# Altium PCB go_sign.PcbDoc (part 3 of 3)
Units mm, origin at the board's own origin, x right, y up, seen from the top; angles counter-clockwise.
Board outline 188.34 x 188.34 mm, 2 copper layers (Top Layer, Bottom Layer); 124 components, 124 nets, 557 pads, 137 vias.
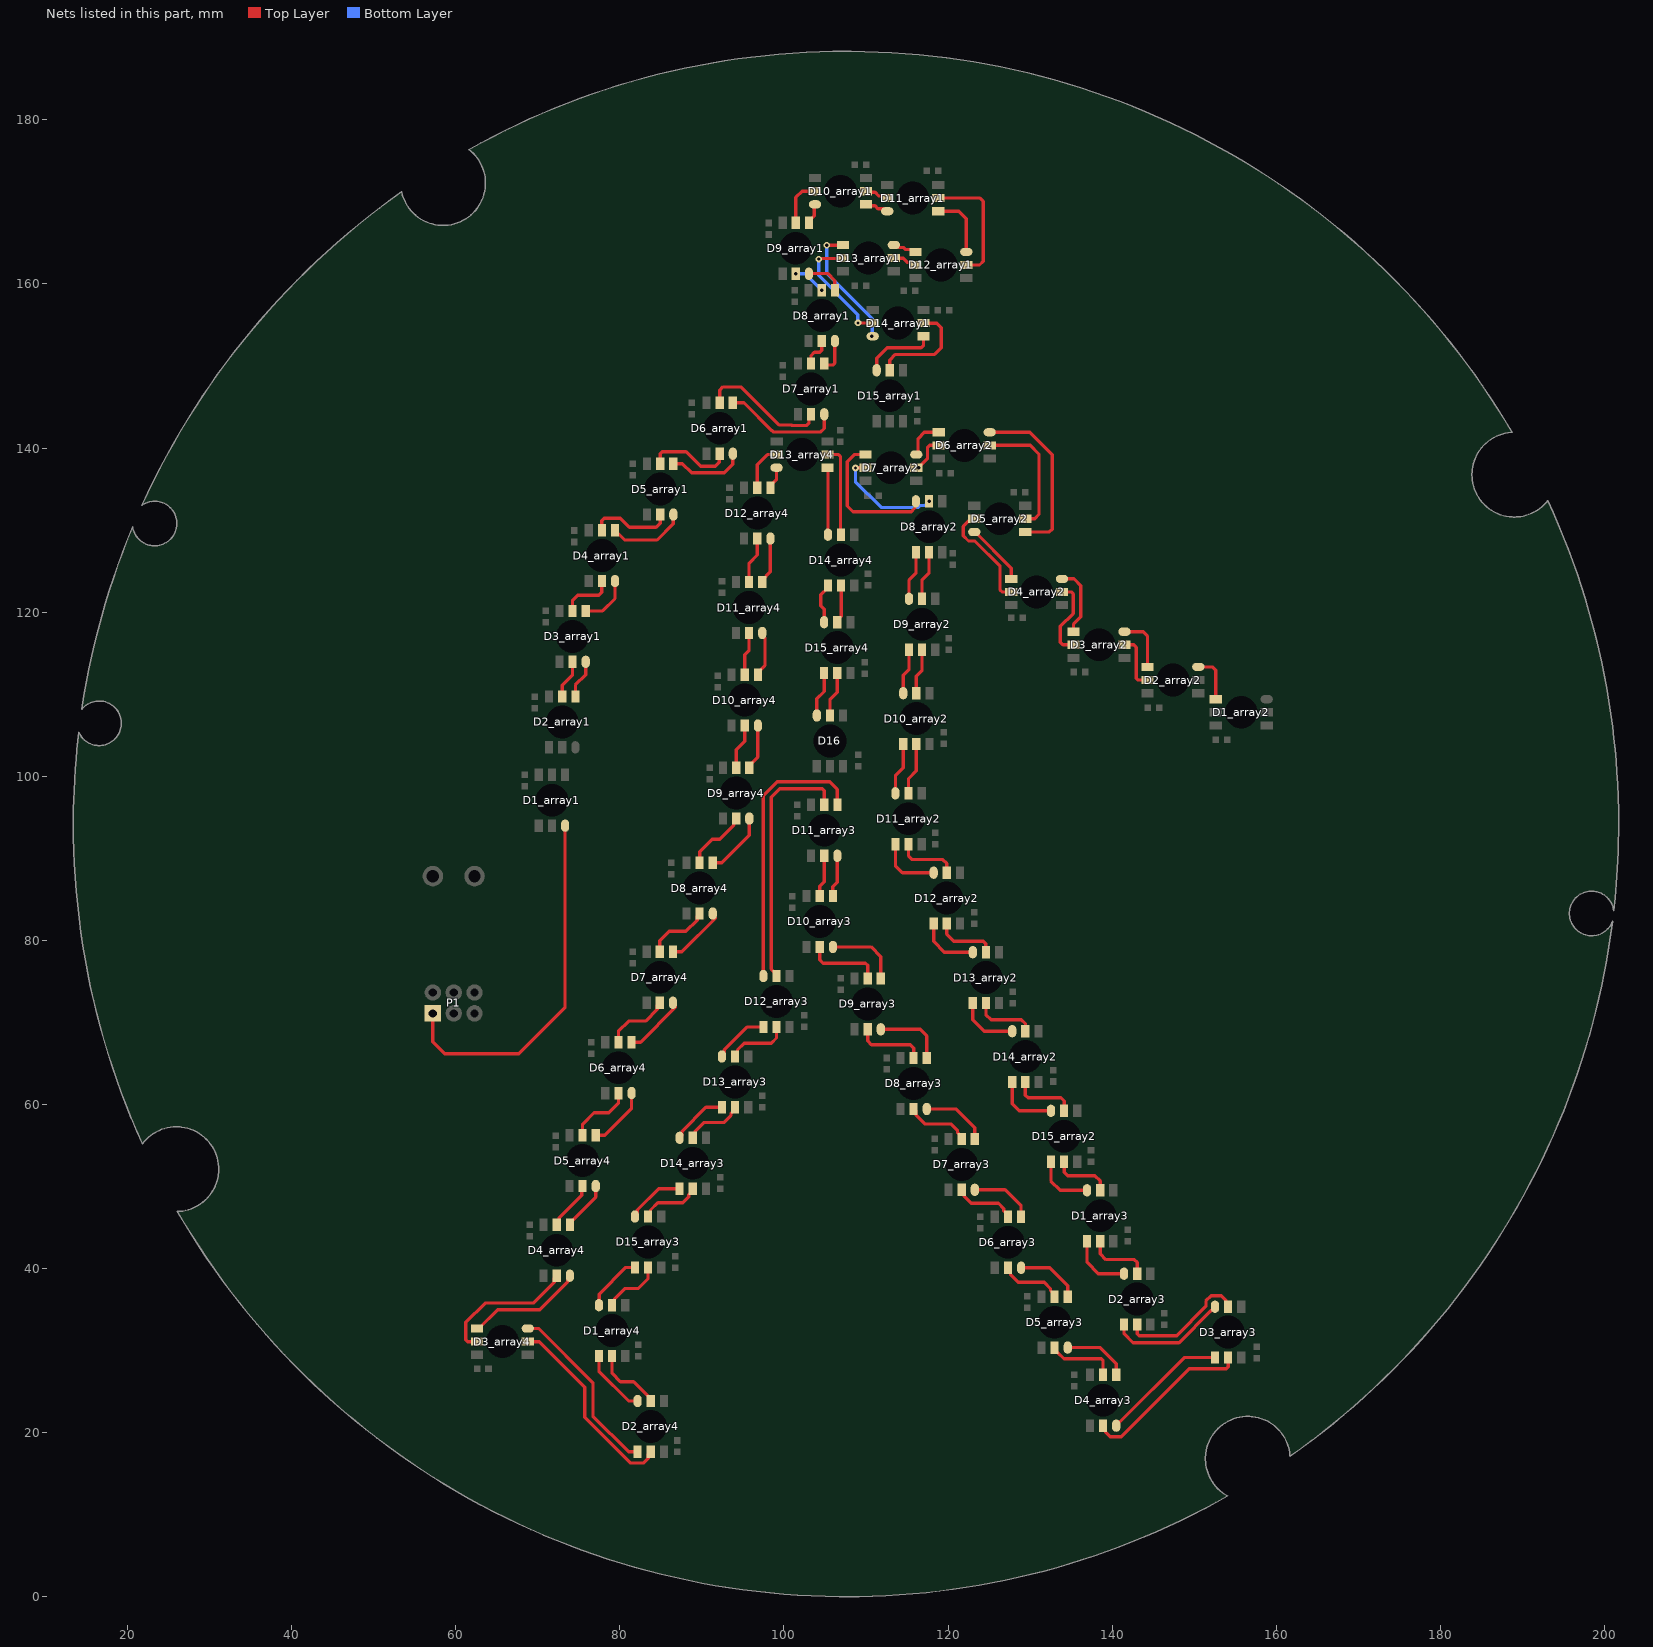
[diagram p2: the nets of this part, all layers, seen from the top]

## Via types
v1: diameter 0.8, hole 0.4, Top Layer to Bottom Layer, 137 vias

## Nets (pads, with @x,y where several pads share a name; then routed paths per layer and width w, separated by ;. In a path a pad name is that pad's centre, name@x,y a point inside that pad or via, vN(x,y) a via of type N, cw(c..) or ccw(c..) an arc to the next point about the centre after c; other vN are vias at no path point) (continued)
NetD1_array2_6: D1_array2.6 D2_array2.1 | length 5.8
  Top Layer w0.4: D2_array2.1@150.509,113.322 152.222,113.322 152.64,112.904 D1_array2.6@152.64,109.385
NetD1_array3_1: D1_array3.1 D15_array2.6 | length 7.2
  Top Layer w0.4: D15_array2.6@132.55,53.021 132.55,50.66 133.679,49.531 D1_array3.1@136.944,49.531
NetD1_array3_2: D1_array3.2 D15_array2.5 | length 7.3
  Top Layer w0.4: D15_array2.5@134.15,53.021 134.15,51.727 134.569,51.308 137.909,51.308 138.544,50.673 D1_array3.2@138.544,49.531
NetD1_array3_5: D1_array3.5 D2_array3.2 | length 7.9
  Top Layer w0.4: D1_array3.5@138.544,43.331 138.544,41.783 139.243,41.084 142.71,41.084 143.053,40.742 D2_array3.2@143.053,39.371
NetD1_array3_6: D1_array3.6 D2_array3.1 | length 7.7
  Top Layer w0.4: D1_array3.6@136.944,43.331 136.944,40.741 138.315,39.371 D2_array3.1@141.453,39.371
NetD1_array4_1: D1_array4.1 D15_array3.6 | length 7.1
  Top Layer w0.4: D1_array4.1@77.458,35.536 77.494,35.572 77.494,36.886 80.739,40.131 D15_array3.6@81.839,40.131
NetD1_array4_2: D1_array4.2 D15_array3.5 | length 7.4
  Top Layer w0.4: D1_array4.2@79.057,35.536 79.358,35.836 79.358,36.334 80.581,37.558 82.216,37.558 83.439,38.781 D15_array3.5@83.439,40.131
NetD1_array4_5: D1_array4.5 D2_array4.2 | length 8.4
  Top Layer w0.4: D1_array4.5@79.057,29.336 79.057,27.216 80.08,26.194 81.677,26.194 83.769,24.102 D2_array4.2@83.769,23.852
NetD1_array4_6: D1_array4.6 D2_array4.1 | length 8.1
  Top Layer w0.4: D1_array4.6@77.458,29.336 77.457,27.464 81.069,23.852 D2_array4.1@82.169,23.852
NetD2_array1_5: D2_array1.5 D3_array1.2 | length 4.7
  Top Layer w0.4: D2_array1.5@72.987,109.716 72.987,111.087 74.244,112.344 D3_array1.2@74.244,113.943
NetD2_array1_6: D2_array1.6 D3_array1.1 | length 4.7
  Top Layer w0.4: D2_array1.6@74.587,109.716 74.587,111.125 75.844,112.382 D3_array1.1@75.844,113.943
NetD2_array2_5: D2_array2.5 D3_array2.2 | length 6.8
  Top Layer w0.4: D3_array2.2@141.505,116.014 142.641,116.014 142.959,115.696 142.959,111.956 143.193,111.722 D2_array2.5@144.309,111.722
NetD2_array2_6: D2_array2.6 D3_array2.1 | length 6.8
  Top Layer w0.4: D3_array2.1@141.505,117.614 143.79,117.614 144.309,117.095 D2_array2.6@144.309,113.322
NetD2_array3_5: D2_array3.5 D3_array3.2 | length 15.6
  Top Layer w0.4: D2_array3.5@143.053,33.171 143.053,32.056 143.287,31.821 147.884,31.821 151.44,35.377 151.44,36.051 152.084,36.695 153.288,36.695 153.84,36.144 153.84,35.645 D3_array3.2@154.14,35.345
NetD2_array3_6: D2_array3.6 D3_array3.1 | length 14.5
  Top Layer w0.4: D2_array3.6@141.453,33.171 141.453,32.056 142.546,30.963 148.157,30.963 152.037,34.842 152.125,34.842 152.54,35.258 D3_array3.1@152.54,35.345
NetD2_array4_5: D2_array4.5 D3_array4.2 | length 24.1
  Top Layer w0.4: D3_array4.2@68.784,31.09 70.185,31.09 75.736,25.538 75.736,21.853 81.288,16.302 82.918,16.302 83.469,16.853 83.469,17.352 D2_array4.5@83.769,17.652
NetD2_array4_6: D2_array4.6 D3_array4.1 | length 22
  Top Layer w0.4: D3_array4.1@68.784,32.69 70.134,32.69 76.727,26.097 76.727,21.994 81.069,17.652 D2_array4.6@82.169,17.652
NetD3_array1_5: D3_array1.5 D4_array1.2 | length 6.6
  Top Layer w0.4: D3_array1.5@74.244,120.143 74.244,121.437 74.854,122.047 77.445,122.047 77.813,122.415 D4_array1.2@77.813,123.786
NetD3_array1_6: D3_array1.6 D4_array1.1 | length 6.3
  Top Layer w0.4: D3_array1.6@75.844,120.143 77.903,120.143 79.413,121.653 D4_array1.1@79.413,123.786
NetD3_array2_5: D3_array2.5 D4_array2.2 | length 9.7
  Top Layer w0.4: D4_array2.2@133.897,122.453 135.013,122.453 135.247,122.219 135.247,119.827 133.693,118.272 133.693,116.332 134.01,116.014 D3_array2.5@135.305,116.014
NetD3_array2_6: D3_array2.6 D4_array2.1 | length 8.6
  Top Layer w0.4: D4_array2.1@133.897,124.053 135.357,124.053 136.182,123.228 136.182,119.431 135.305,118.553 D3_array2.6@135.305,117.614
NetD3_array3_5: D3_array3.5 D4_array3.2 | length 20.7
  Top Layer w0.4: D4_array3.2@138.9,20.852 139.2,20.552 139.2,20.054 139.751,19.502 141.105,19.502 149.398,27.795 153.906,27.795 154.14,28.03 D3_array3.5@154.14,29.145
NetD3_array3_6: D3_array3.6 D4_array3.1 | length 15.5
  Top Layer w0.4: D4_array3.1@140.5,20.852 140.5,20.94 140.915,21.355 141.003,21.355 148.793,29.145 D3_array3.6@152.54,29.145
NetD3_array4_5: D3_array4.5 D4_array4.2 | length 17.3
  Top Layer w0.4: D3_array4.5@62.584,31.09 61.469,31.09 61.234,31.324 61.234,33.438 63.58,35.784 69.468,35.784 72.014,38.329 72.014,38.827 D4_array4.2@72.314,39.128
NetD3_array4_6: D3_array4.6 D4_array4.1 | length 14.3
  Top Layer w0.4: D3_array4.6@62.584,32.69 62.834,32.69 65.128,34.984 70.268,34.984 73.614,38.329 73.614,38.827 D4_array4.1@73.914,39.128
NetD4_array1_5: D4_array1.5 D5_array1.2 | length 10.1
  Top Layer w0.4: D4_array1.5@77.813,129.986 77.813,131.153 78.092,131.432 80.065,131.432 81.17,130.327 84.417,130.327 84.925,130.835 D5_array1.2@84.925,131.888
NetD4_array1_6: D4_array1.6 D5_array1.1 | length 9.5
  Top Layer w0.4: D4_array1.6@79.413,129.986 80.608,128.791 84.544,128.791 86.525,130.772 D5_array1.1@86.525,131.888
NetD4_array2_5: D4_array2.5 D5_array2.2 | length 13.2
  Top Layer w0.4: D5_array2.2@123.202,131.369 122.901,131.069 122.48,131.069 121.852,130.44 121.852,129.313 122.496,128.669 123.258,128.669 126.347,125.579 126.347,122.688 126.582,122.453 D4_array2.5@127.697,122.453
NetD4_array2_6: D4_array2.6 D5_array2.1 | length 7.5
  Top Layer w0.4: D5_array2.1@123.289,129.769 127.697,125.361 D4_array2.6@127.697,124.053
NetD4_array3_5: D4_array3.5 D5_array3.2 | length 8.4
  Top Layer w0.4: D5_array3.2@132.99,30.36 132.99,30.11 133.29,29.81 133.335,29.81 134.135,29.01 138.666,29.01 138.9,28.776 D4_array3.5@138.9,27.052
NetD4_array3_6: D4_array3.6 D5_array3.1 | length 8.1
  Top Layer w0.4: D5_array3.1@134.59,30.36 138.542,30.36 140.5,28.402 D4_array3.6@140.5,27.052
NetD4_array4_5: D4_array4.5 D5_array4.2 | length 6
  Top Layer w0.4: D4_array4.5@72.314,45.327 72.614,45.628 72.614,46.198 75.35,48.934 75.35,49.936 D5_array4.2@75.463,50.05
NetD4_array4_6: D4_array4.6 D5_array4.1 | length 6
  Top Layer w0.4: D4_array4.6@73.914,45.327 73.914,45.577 74.214,45.878 74.237,45.878 77.063,48.704 D5_array4.1@77.063,50.05
NetD5_array1_5: D5_array1.5 D6_array1.2 | length 10.5
  Top Layer w0.4: D5_array1.5@84.925,138.088 84.925,139.294 85.166,139.535 88.075,139.535 89.84,137.769 91.643,137.769 92.126,138.252 92.126,139.254 D6_array1.2@92.177,139.305
NetD5_array1_6: D5_array1.6 D6_array1.1 | length 9.5
  Top Layer w0.4: D5_array1.6@86.525,138.088 87.631,138.088 88.75,136.969 92.748,136.969 93.777,137.998 D6_array1.1@93.777,139.305 ; D6_array1.1@93.777,139.509 D6_array1.1@93.777,139.532
NetD5_array2_5: D5_array2.5 D6_array2.2 | length 15.7
  Top Layer w0.4: D6_array2.2@125.071,140.322 130.023,140.322 131.089,139.255 131.089,131.902 130.556,131.369 D5_array2.5@129.401,131.369
NetD5_array2_6: D5_array2.6 D6_array2.1 | length 21.3
  Top Layer w0.4: D6_array2.1@125.071,141.922 129.947,141.922 132.69,139.179 132.69,130.099 132.36,129.769 D5_array2.6@129.401,129.769
NetD5_array3_5: D5_array3.5 D6_array3.2 | length 7.7
  Top Layer w0.4: D6_array3.2@127.305,40.093 127.605,39.793 127.605,39.294 128.573,38.326 131.723,38.326 132.49,37.559 132.49,37.31 132.99,36.81 D5_array3.5@132.99,36.56
NetD5_array3_6: D5_array3.6 D6_array3.1 | length 7.9
  Top Layer w0.4: D6_array3.1@128.905,40.093 132.408,40.093 134.59,37.91 D5_array3.6@134.59,36.56
NetD5_array4_5: D5_array4.5 D6_array4.2 | length 8
  Top Layer w0.4: D5_array4.5@75.463,56.249 75.463,57.599 76.853,58.989 78.674,58.989 79.832,60.147 D6_array4.2@79.832,61.378
NetD5_array4_6: D5_array4.6 D6_array4.1 | length 7.6
  Top Layer w0.4: D5_array4.6@77.063,56.249 78.163,56.249 81.432,59.518 D6_array4.1@81.432,61.378
NetD6_array1_5: D6_array1.5 D7_array1.2 | length 15.6
  Top Layer w0.4: D6_array1.5@92.177,145.505 92.177,147.053 92.57,147.447 94.762,147.447 99.391,142.817 100.904,142.817 100.966,142.756 102.774,142.756 103.07,143.052 103.07,143.684 D7_array1.2@103.302,143.915
NetD6_array1_6: D6_array1.6 D7_array1.1 | length 14.3
  Top Layer w0.4: D6_array1.6@93.777,145.505 95.136,145.505 98.536,142.105 98.565,142.105 98.714,141.956 104.478,141.956 104.902,142.379 D7_array1.1@104.902,143.915
NetD6_array2_5: D6_array2.5 D7_array2.2 | length 4.5
  Top Layer w0.4: D7_array2.2@116.346,137.605 v1(116.421,137.605) 116.421,137.633 117.513,138.725 117.513,140.088 117.747,140.322 D6_array2.5@118.871,140.322
NetD6_array2_6: D6_array2.6 D7_array2.1 | length 4.8
  Top Layer w0.4: D7_array2.1@116.346,139.204 116.346,141.149 117.119,141.922 D6_array2.6@118.871,141.922
NetD6_array3_5: D6_array3.5 D7_array3.2 | length 7.6
  Top Layer w0.4: D7_array3.2@121.666,49.592 121.966,49.292 121.966,48.794 122.817,47.943 126.154,47.943 126.805,47.291 126.805,47.043 127.305,46.543 D6_array3.5@127.305,46.293
NetD6_array3_6: D6_array3.6 D7_array3.1 | length 7.8
  Top Layer w0.4: D7_array3.1@123.266,49.592 126.955,49.592 128.905,47.643 D6_array3.6@128.905,46.293
NetD6_array4_5: D6_array4.5 D7_array4.2 | length 8.1
  Top Layer w0.4: D6_array4.5@79.832,67.578 79.832,68.928 81.063,70.159 83.143,70.159 84.574,71.59 84.574,72.089 D7_array4.2@84.874,72.389
NetD6_array4_6: D6_array4.6 D7_array4.1 | length 7.8
  Top Layer w0.4: D6_array4.6@81.432,67.578 82.532,67.578 86.784,71.829 86.474,72.139 D7_array4.1@86.474,72.389
NetD7_array1_5: D7_array1.5 D8_array1.2 | length 3.8
  Top Layer w0.4: D7_array1.5@103.302,150.115 103.302,151.27 103.716,151.684 104.376,151.684 104.61,151.918 D8_array1.2@104.61,153.034
NetD7_array1_6: D7_array1.6 D8_array1.1 | length 4.1
  Top Layer w0.4: D7_array1.6@104.902,150.115 105.976,150.115 106.21,150.35 D8_array1.1@106.21,153.034
NetD7_array2_5: D7_array2.5 D8_array2.2 | length 13.8
  Top Layer w0.4: v1(108.721,137.566) 108.74,137.585 110.127,137.585 D7_array2.5@110.146,137.605 ; D8_array2.2@117.691,133.504 v1(117.716,133.502) v1(117.716,133.502)
  Bottom Layer w0.4: v1(108.721,137.566) 108.721,135.881 111.849,132.753 116.363,132.753 116.614,133.004 117.217,133.004 v1(117.716,133.502)
NetD7_array2_6: D7_array2.6 D8_array2.1 | length 17.8
  Top Layer w0.4: D7_array2.6@110.146,139.204 108.585,139.204 107.721,138.341 107.721,132.931 108.42,132.232 115.506,132.232 115.976,132.702 115.976,133.389 D8_array2.1@116.091,133.504
NetD7_array3_5: D7_array3.5 D8_array3.2 | length 8
  Top Layer w0.4: D8_array3.2@115.807,59.451 116.107,59.151 116.107,58.653 117.138,57.622 120.335,57.622 121.166,56.791 121.166,56.542 121.666,56.042 D7_array3.5@121.666,55.792
NetD7_array3_6: D7_array3.6 D8_array3.1 | length 8.2
  Top Layer w0.4: D8_array3.1@117.407,59.451 120.957,59.451 123.266,57.142 D7_array3.6@123.266,55.792
NetD7_array4_5: D7_array4.5 D8_array4.2 | length 7.9
  Top Layer w0.4: D7_array4.5@84.874,78.589 84.874,79.939 86.035,81.1 88.064,81.1 89.425,82.461 89.425,82.96 D8_array4.2@89.725,83.26
NetD7_array4_6: D7_array4.6 D8_array4.1 | length 7.6
  Top Layer w0.4: D7_array4.6@86.474,78.589 87.574,78.589 91.66,82.675 91.325,83.01 D8_array4.1@91.325,83.26
NetD8_array1_5: D8_array1.5 D9_array1.2 | length 4
  Bottom Layer w0.4: v1(101.448,161.238) 102.606,161.238 v1(104.61,159.234)
NetD8_array1_6: D8_array1.6 D9_array1.1 | length 4.7
  Top Layer w0.4: D9_array1.1@103.048,161.238 103.088,161.279 105.324,161.279 106.21,160.393 D8_array1.6@106.21,159.234
NetD8_array2_5: D8_array2.5 D9_array2.2 | length 6
  Top Layer w0.4: D9_array2.2@116.84,121.616 116.84,123.952 117.691,124.803 D8_array2.5@117.691,127.304
NetD8_array2_6: D8_array2.6 D9_array2.1 | length 6
  Top Layer w0.4: D9_array2.1@115.24,121.616 115.24,123.863 116.091,124.714 D8_array2.6@116.091,127.304
NetD8_array3_5: D8_array3.5 D9_array3.2 | length 8.6
  Top Layer w0.4: D9_array3.2@110.211,69.15 110.211,67.742 110.668,67.285 115.392,67.285 115.807,66.869 D8_array3.5@115.807,65.651
NetD8_array3_6: D8_array3.6 D9_array3.1 | length 8.6
  Top Layer w0.4: D9_array3.1@111.811,69.15 116.6,69.15 117.407,68.343 D8_array3.6@117.407,65.651
NetD8_array4_5: D8_array4.5 D9_array4.2 | length 7.8
  Top Layer w0.4: D8_array4.5@89.725,89.46 89.725,90.81 91.242,92.327 92.166,92.327 93.883,94.044 93.883,94.542 D9_array4.2@94.183,94.842
NetD8_array4_6: D8_array4.6 D9_array4.1 | length 7.9
  Top Layer w0.4: D8_array4.6@91.325,89.46 92.425,89.46 95.783,92.818 D9_array4.1@95.783,94.842
NetD9_array1_5: D9_array1.5 D10_array1.2 | length 5.8
  Top Layer w0.4: D9_array1.5@101.448,167.438 101.448,170.536 102.21,171.298 D10_array1.2@103.796,171.298
NetD9_array1_6: D9_array1.6 D10_array1.1 | length 2.6
  Top Layer w0.4: D9_array1.6@103.048,167.438 103.048,167.688 103.683,168.323 103.683,169.585 D10_array1.1@103.796,169.698
NetD9_array2_5: D9_array2.5 D10_array2.2 | length 5.6
  Top Layer w0.4: D10_array2.2@116.141,110.123 116.141,112.204 116.84,112.903 D9_array2.5@116.84,115.416
NetD9_array2_6: D9_array2.6 D10_array2.1 | length 5.6
  Top Layer w0.4: D10_array2.1@114.542,110.123 114.542,112.294 115.24,112.992 D9_array2.6@115.24,115.416
NetD9_array3_5: D9_array3.5 D10_array3.2 | length 9.3
  Top Layer w0.4: D10_array3.2@104.369,79.196 104.369,77.61 104.762,77.216 109.944,77.216 110.211,76.949 D9_array3.5@110.211,75.35
NetD9_array3_6: D9_array3.6 D10_array3.1 | length 9.2
  Top Layer w0.4: D10_array3.1@105.969,79.446 D10_array3.1@105.969,79.196 110.618,79.196 111.811,78.004 D9_array3.6@111.811,75.35
NetD9_array4_5: D9_array4.5 D10_array4.2 | length 5.6
  Top Layer w0.4: D9_array4.5@94.183,101.042 94.183,103.236 95.225,104.277 D10_array4.2@95.225,106.171
NetD9_array4_6: D9_array4.6 D10_array4.1 | length 5.6
  Top Layer w0.4: D9_array4.6@95.783,101.042 95.783,101.292 96.825,102.334 D10_array4.1@96.825,106.171
NetD10_array1_5: D10_array1.5 D11_array1.2 | length 2.9
  Top Layer w0.4: D10_array1.5@109.996,171.298 110.135,171.159 111.112,171.159 111.555,170.716 112.341,170.716 D11_array1.2@112.597,170.459
NetD10_array1_6: D10_array1.6 D11_array1.1 | length 2.9
  Top Layer w0.4: D10_array1.6@109.996,169.698 110.182,169.511 111.108,169.511 111.46,169.159 112.297,169.159 D11_array1.1@112.597,168.859
NetD10_array2_5: D10_array2.5 D11_array2.2 | length 6.4
  Top Layer w0.4: D11_array2.2@115.189,97.918 115.189,99.72 116.141,100.673 D10_array2.5@116.141,103.923
NetD10_array2_6: D10_array2.6 D11_array2.1 | length 6.4
  Top Layer w0.4: D11_array2.1@113.589,97.918 113.589,100.076 114.542,101.029 D10_array2.6@114.542,103.923
NetD10_array3_5: D10_array3.5 D11_array3.2 | length 5.1
  Top Layer w0.4: D10_array3.5@104.369,85.396 104.369,86.601 104.915,87.147 D11_array3.2@104.915,90.309
NetD10_array3_6: D10_array3.6 D11_array3.1 | length 5.1
  Top Layer w0.4: D10_array3.6@105.969,85.396 105.969,86.525 106.515,87.071 D11_array3.1@106.515,90.309
NetD10_array4_5: D10_array4.5 D11_array4.2 | length 5.3
  Top Layer w0.4: D10_array4.5@95.225,112.371 95.225,114.799 95.758,115.333 D11_array4.2@95.758,117.461
NetD10_array4_6: D10_array4.6 D11_array4.1 | length 5.6
  Top Layer w0.4: D10_array4.6@96.825,112.371 96.825,112.621 97.69,113.486 97.69,116.879 97.358,117.211 D11_array4.1@97.358,117.461
NetD11_array1_5: D11_array1.5 D12_array1.2 | length 15.2
  Top Layer w0.4: D11_array1.5@118.797,170.459 123.901,170.459 124.308,170.053 124.308,162.776 123.838,162.306 D12_array1.2@122.237,162.306
NetD11_array1_6: D11_array1.6 D12_array1.1 | length 7.9
  Top Layer w0.4: D11_array1.6@118.797,168.859 121.31,168.859 122.237,167.932 D12_array1.1@122.237,163.906
NetD11_array2_5: D11_array2.5 D12_array2.2 | length 7.6
  Top Layer w0.4: D11_array2.5@115.189,91.718 115.189,90.272 115.621,89.84 119.38,89.84 119.85,89.37 D12_array2.2@119.85,88.241
NetD11_array2_6: D11_array2.6 D12_array2.1 | length 7.6
  Top Layer w0.4: D11_array2.6@113.589,91.718 113.589,89.103 114.451,88.241 D12_array2.1@118.25,88.241
NetD11_array3_5: D11_array3.5 D12_array3.2 | length 30.8
  Top Layer w0.4: D12_array3.2@99.098,75.642 99.098,75.892 98.798,76.192 98.754,76.192 98.45,76.496 98.45,97.433 99.48,98.463 104.68,98.463 104.915,98.229 D11_array3.5@104.915,96.508
NetD11_array3_6: D11_array3.6 D12_array3.1 | length 33.9
  Top Layer w0.4: D12_array3.1@97.474,75.666 97.498,75.69 97.498,97.612 99.2,99.314 105.588,99.314 106.515,98.387 D11_array3.6@106.515,96.508
NetD11_array4_5: D11_array4.5 D12_array4.2 | length 5.7
  Top Layer w0.4: D11_array4.5@95.758,123.661 95.758,125.969 96.749,126.96 D12_array4.2@96.749,128.967
NetD11_array4_6: D11_array4.6 D12_array4.1 | length 5.7
  Top Layer w0.4: D11_array4.6@97.358,123.661 97.358,123.911 98.349,124.902 D12_array4.1@98.349,128.967
NetD12_array1_5: D12_array1.5 D13_array1.2 | length 3
  Top Layer w0.4: D13_array1.2@113.399,163.144 114.554,163.144 115.092,162.606 115.738,162.606 D12_array1.5@116.038,162.306
NetD12_array1_6: D12_array1.6 D13_array1.1 | length 3
  Top Layer w0.4: D13_array1.1@113.399,164.744 113.7,164.444 114.562,164.444 114.8,164.206 115.738,164.206 D12_array1.6@116.038,163.906
NetD12_array2_5: D12_array2.5 D13_array2.2 | length 7.6
  Top Layer w0.4: D12_array2.5@119.85,82.041 119.85,80.759 120.709,79.901 124.303,79.901 124.612,79.591 124.612,78.563 D13_array2.2@124.625,78.551
NetD12_array2_6: D12_array2.6 D13_array2.1 | length 7.5
  Top Layer w0.4: D12_array2.6@118.25,82.041 118.25,79.857 119.557,78.551 D13_array2.1@123.025,78.551
NetD12_array3_5: D12_array3.5 D13_array3.2 | length 7.6
  Top Layer w0.4: D13_array3.2@94.043,65.838 94.344,66.138 94.344,66.637 95.171,67.464 98.47,67.464 99.098,68.092 D12_array3.5@99.098,69.442
NetD12_array3_6: D12_array3.6 D13_array3.1 | length 6.8
  Top Layer w0.4: D13_array3.1@92.444,65.838 92.744,66.138 92.744,66.637 95.549,69.442 D12_array3.6@97.498,69.442
NetD12_array4_5: D12_array4.5 D13_array4.2 | length 5.7
  Top Layer w0.4: D12_array4.5@96.749,135.167 96.749,137.959 97.994,139.205 D13_array4.2@99.11,139.205
NetD12_array4_6: D12_array4.6 D13_array4.1 | length 2.8
  Top Layer w0.4: D12_array4.6@98.349,135.167 98.349,135.417 99.11,136.178 D13_array4.1@99.11,137.605
NetD13_array1_5: D13_array1.5 D14_array1.2 | length 14.6
  Top Layer w0.4: v1(104.229,163.03) 104.286,163.087 107.142,163.087 D13_array1.5@107.2,163.144 ; v1(109.029,155.245) 109.042,155.232 110.806,155.232 D14_array1.2@110.819,155.219
  Bottom Layer w0.4: v1(104.229,163.03) 104.229,161.029 109.013,156.245 109.013,155.261 v1(109.029,155.245)
NetD13_array1_6: D13_array1.6 D14_array1.1 | length 15.5
  Top Layer w0.4: v1(105.232,164.706) 105.251,164.725 107.181,164.725 D13_array1.6@107.2,164.744 ; v1(110.719,153.606) 110.732,153.619 D14_array1.1@110.819,153.619
  Bottom Layer w0.4: v1(105.232,164.706) 105.229,164.703 105.229,161.306 110.769,155.766 110.769,153.657 v1(110.719,153.606)
NetD13_array2_5: D13_array2.5 D14_array2.2 | length 7.6
  Top Layer w0.4: D13_array2.5@124.625,72.351 124.625,70.929 125.247,70.307 128.943,70.307 129.451,69.799 129.451,68.949 D14_array2.2@129.426,68.924
NetD13_array2_6: D13_array2.6 D14_array2.1 | length 7.4
  Top Layer w0.4: D13_array2.6@123.025,72.351 123.025,70.294 124.395,68.924 D14_array2.1@127.826,68.924
NetD13_array3_5: D13_array3.5 D14_array3.2 | length 7.3
  Top Layer w0.4: D14_array3.2@88.887,55.932 89.187,56.232 89.187,56.731 90.242,57.785 92.689,57.785 93.543,58.639 93.543,58.888 94.043,59.388 D13_array3.5@94.043,59.638
NetD13_array3_6: D13_array3.6 D14_array3.1 | length 7
  Top Layer w0.4: D14_array3.1@87.287,55.932 87.587,56.232 87.587,56.731 90.495,59.638 D13_array3.6@92.444,59.638
NetD13_array4_5: D13_array4.5 D14_array4.2 | length 11.2
  Top Layer w0.4: D13_array4.5@105.31,139.205 106.66,139.205 106.894,138.97 106.894,129.518 D14_array4.2@106.972,129.44
NetD13_array4_6: D13_array4.6 D14_array4.1 | length 8.2
  Top Layer w0.4: D13_array4.6@105.31,137.605 105.372,137.542 D14_array4.1@105.372,129.44
NetD14_array1_5: D14_array1.5 D15_array1.2 | length 13
  Top Layer w0.4: D15_array1.2@112.903,149.48 112.903,150.724 113.589,151.409 118.364,151.409 119.189,152.235 119.189,154.661 118.631,155.219 D14_array1.5@117.019,155.219
NetD14_array1_6: D14_array1.6 D15_array1.1 | length 8.9
  Top Layer w0.4: D15_array1.1@111.303,149.48 111.303,150.94 112.598,152.235 116.713,152.235 117.019,152.541 D14_array1.6@117.019,153.619
NetD14_array2_5: D14_array2.5 D15_array2.2 | length 7.8
  Top Layer w0.4: D14_array2.5@129.426,62.724 129.426,61.125 129.756,60.795 133.769,60.795 134.15,60.414 D15_array2.2@134.15,59.221
NetD14_array2_6: D14_array2.6 D15_array2.1 | length 7.7
  Top Layer w0.4: D14_array2.6@127.826,62.724 127.826,60.071 128.675,59.221 D15_array2.1@132.55,59.221
NetD14_array3_5: D14_array3.5 D15_array3.2 | length 7.4
  Top Layer w0.4: D15_array3.2@83.439,46.331 83.739,46.631 83.739,47.129 84.641,48.031 87.685,48.031 88.387,48.733 88.387,48.982 88.887,49.482 D14_array3.5@88.887,49.732
NetD14_array3_6: D14_array3.6 D15_array3.1 | length 7.1
  Top Layer w0.4: D15_array3.1@81.839,46.331 82.139,46.631 82.139,47.129 84.742,49.732 D14_array3.6@87.287,49.732
NetD14_array4_5: D14_array4.5 D15_array4.2 | length 4.7
  Top Layer w0.4: D15_array4.2@106.502,118.772 106.502,119.022 106.972,119.491 D14_array4.5@106.972,123.24
NetD14_array4_6: D14_array4.6 D15_array4.1 | length 5
  Top Layer w0.4: D15_array4.1@104.902,118.772 104.902,120.375 104.506,120.771 104.506,122.124 105.372,122.99 D14_array4.6@105.372,123.24
NetD15_array4_5: D15_array4.5 D16.2 | length 5.5
  Top Layer w0.4: D16.2@105.613,107.405 105.613,109.322 106.502,110.211 D15_array4.5@106.502,112.572
NetD15_array4_6: D15_array4.6 D16.1 | length 5.5
  Top Layer w0.4: D16.1@104.013,107.405 104.013,109.436 104.902,110.325 D15_array4.6@104.902,112.572
SDI: D1_array1.1 P1.1 | length 44.7
  Top Layer w0.4: P1.1@57.213,71.095 57.213,67.627 58.661,66.18 67.666,66.18 73.33,71.844 73.33,93.89 73.285,93.934 D1_array1.1@73.33,93.979
pads on no net: D1_array1.nc D1_array2.nc D1_array3.nc D1_array4.nc D2_array1.nc D2_array2.nc D2_array3.nc D2_array4.nc D3_array1.nc D3_array2.nc D3_array3.nc D3_array4.nc D4_array1.nc D4_array2.nc D4_array3.nc D4_array4.nc D5_array1.nc D5_array2.nc D5_array3.nc D5_array4.nc D6_array1.nc D6_array2.nc D6_array3.nc D6_array4.nc D7_array1.nc D7_array2.nc D7_array3.nc D7_array4.nc D8_array1.nc D8_array2.nc D8_array3.nc D8_array4.nc D9_array1.nc D9_array2.nc D9_array3.nc D9_array4.nc D10_array1.nc D10_array2.nc D10_array3.nc D10_array4.nc D11_array1.nc D11_array2.nc D11_array3.nc D11_array4.nc D12_array1.nc D12_array2.nc D12_array3.nc D12_array4.nc D13_array1.nc D13_array2.nc D13_array3.nc D13_array4.nc D14_array1.nc D14_array2.nc D14_array3.nc D14_array4.nc D15_array1.nc D15_array2.nc D15_array3.nc D15_array4.nc D16.5 D16.6 D16.nc P1.3

## Polygon pours and split planes (outlines as drawn)
GND on Top Layer "NONET_L01_P021" (solid, remove dead copper, shelved, pour order 21): 13.398,94.176 13.4,94.844 cw(c107.431,94.169) 13.486,98.236 cw(c108.373,94.129) 13.641,100.929 cw(c109.341,94.06) 13.836,103.248 cw(c110.279,93.97) 14.06,105.342 ccw(c16.538,106.451) 16.216,103.755 ccw(c16.534,106.46) 16.397,103.74 ccw(c16.535,106.49) 16.536,103.737 ccw(c16.536,106.495) 16.674,103.74 ccw(c16.535,106.451) 19.229,106.118 ccw(c16.523,106.448) 19.245,106.307 ccw(c16.496,106.45) 19.249,106.45 ccw(c16.495,106.45) 19.245,106.588 ccw(c16.535,106.45) 16.868,109.143 ccw(c16.537,106.437) 16.678,109.16 ccw(c16.536,106.41) 16.536,109.163 16.49,109.163 ccw(c16.535,106.421) 16.339,109.156 ccw(c16.53,106.469) 15.285,108.858 ccw(c16.546,106.44) 14.434,108.165 cw(c106.909,94.405) 20.624,130.405 ccw(c23.311,130.799) 21.771,128.563 ccw(c23.301,130.779) 22.634,128.17 ccw(c23.301,130.782) 22.991,128.104 ccw(c23.304,130.81) 23.168,128.089 ccw(c23.306,130.84) 23.306,128.086 ccw(c23.306,130.844) 23.444,128.089 ccw(c23.305,130.8) 25.999,130.467 ccw(c23.292,130.797) 26.016,130.656 ccw(c23.266,130.799) 26.019,130.799 ccw(c23.261,130.799) 26.016,130.938 ccw(c23.305,130.799) 23.638,133.492 ccw(c23.308,130.788) 23.449,133.509 ccw(c23.306,130.76) 23.306,133.512 ccw(c23.306,130.763) 23.244,133.512 ccw(c23.305,130.786) 23.08,133.503 ccw(c23.302,130.82) 22.506,133.392 ccw(c23.304,130.813) 22.07,133.214 ccw(c23.318,130.787) 21.764,133.03 cw(c107.829,93.914) 53.412,171.22 ccw(c58.467,172.294) 57.847,167.164 ccw(c58.46,172.319) 58.197,167.134 ccw(c58.463,172.373) 58.464,167.128 ccw(c58.464,172.377) 58.727,167.134 ccw(c58.463,172.293) 63.589,171.66 ccw(c58.433,172.289) 63.621,172.02 ccw(c58.385,172.291) 63.628,172.292 ccw(c58.406,172.292) 63.626,172.411 ccw(c58.428,172.293) 63.611,172.703 ccw(c58.516,172.302) 63.183,174.387 ccw(c58.483,172.287) 62.789,175.107 ccw(c58.427,172.249) 61.61,176.38 cw(c107.372,94.762) 96.031,187.644 cw(c107.512,93.722) 102.74,188.223 cw(c107.563,92.753) 107.567,188.345 108.189,188.343 cw(c107.575,92.784) 113.131,188.183 cw(c107.59,94.201) 188.756,141.902 ccw(c189.022,136.683) 188.633,141.894 ccw(c189.018,136.745) 184.783,139.699 ccw(c188.984,136.761) 184.021,138.047 ccw(c188.99,136.761) 183.892,137.355 ccw(c189.046,136.754) 183.864,137.015 ccw(c189.099,136.752) 183.857,136.751 ccw(c189.106,136.751) 183.864,136.488 ccw(c189.022,136.752) 188.389,131.625 ccw(c189.018,136.784) 188.749,131.594 ccw(c189.021,136.834) 189.021,131.587 ccw(c189.021,136.829) 189.141,131.589 ccw(c189.023,136.787) 189.432,131.603 ccw(c189.032,136.699) 191.109,132.029 ccw(c189.017,136.732) 191.833,132.423 ccw(c188.978,136.788) 193.105,133.599 cw(c108.158,94.371) 200.997,106.02 cw(c107.157,94.232) 201.61,99.086 cw(c106.186,94.18) 201.736,94.176 201.731,93.211 cw(c108.008,94.184) 201.676,90.809 cw(c107.085,94.216) 201.578,88.74 cw(c106.161,94.269) 201.453,86.883 cw(c105.177,94.345) 201.306,85.182 201.141,83.594 ccw(c198.446,83.272) 199.957,85.527 ccw(c198.453,83.287) 199.254,85.863 ccw(c198.455,83.29) 198.773,85.966 ccw(c198.45,83.259) 198.59,85.981 ccw(c198.449,83.232) 198.449,85.985 ccw(c198.448,83.231) 198.31,85.982 ccw(c198.449,83.271) 195.755,83.604 ccw(c198.465,83.273) 195.739,83.415 ccw(c198.492,83.272) 195.735,83.272 ccw(c198.493,83.272) 195.739,83.133 ccw(c198.449,83.272) 198.117,80.578 ccw(c198.447,83.287) 198.306,80.562 ccw(c198.449,83.315) 198.449,80.558 198.477,80.558 ccw(c198.449,83.306) 198.617,80.563 ccw(c198.446,83.271) 200.999,82.353 cw(c108.192,93.955) 195.022,59.193 cw(c107.343,94.396) 161.685,17.106 ccw(c156.483,16.811) 161.678,17.203 ccw(c156.53,16.814) 159.48,21.051 ccw(c156.545,16.848) 157.827,21.812 ccw(c156.546,16.842) 157.138,21.94 ccw(c156.539,16.789) 156.798,21.968 ccw(c156.536,16.734) 156.536,21.975 ccw(c156.535,16.73) 156.272,21.968 ccw(c156.536,16.809) 151.41,17.442 ccw(c156.566,16.814) 151.379,17.083 ccw(c156.618,16.811) 151.372,16.811 ccw(c156.64,16.81) 151.372,16.746 ccw(c156.604,16.81) 151.383,16.461 ccw(c156.536,16.81) 154.067,12.274 cw(c107.771,93.583) 119.009,0.695 cw(c107.623,94.677) 112.408,0.129 cw(c107.572,95.649) 107.567,0.006 106.733,0.01 cw(c107.557,95.524) 101.662,0.189 cw(c107.546,94.158) 26.083,46.95 ccw(c25.955,52.184) 26.308,46.96 ccw(c25.959,52.11) 30.218,49.194 ccw(c25.988,52.098) 30.929,50.713 ccw(c25.987,52.097) 31.083,51.493 ccw(c25.931,52.104) 31.113,51.839 ccw(c25.879,52.107) 31.12,52.107 ccw(c25.874,52.107) 31.113,52.371 ccw(c25.954,52.106) 26.587,57.233 ccw(c25.959,52.076) 26.228,57.264 ccw(c25.956,52.028) 25.955,57.271 ccw(c25.955,52.03) 25.849,57.27 ccw(c25.954,52.073) 25.563,57.256 ccw(c25.945,52.161) 23.826,56.81 ccw(c25.962,52.126) 23.125,56.423 ccw(c26.001,52.069) 21.823,55.194 cw(c106.958,93.966) 14.094,82.676 cw(c108.07,94.12) 13.521,89.325 cw(c109.045,94.171)
5V on Top Layer "NONET_L-01_P-001" (solid, pour order 10): 155.181,29.87 156.223,29.87 156.223,29.693 158.229,29.693 158.356,29.82 158.356,35.154 156.299,37.211 150.851,37.211 148.857,35.217 148.857,33.68 147.587,32.41 144.107,32.41 144.107,33.96 145.085,33.96 145.085,33.63 146.863,33.63 147.13,33.896 147.13,40.475 145.39,42.215 145.364,42.189 140.017,42.189 139.649,42.558 139.649,44.069 141.173,44.069 141.173,43.777 142.329,43.777 142.634,44.082 142.634,50.457 141.148,51.943 135.255,51.943 135.255,53.772 136.246,53.772 136.246,53.518 137.757,53.518 138.163,53.924 138.163,59.461 135.814,61.811 130.518,61.811 130.518,63.5 131.508,63.5 131.508,63.309 133.083,63.309 133.452,63.678 133.452,69.253 131.432,71.272 125.73,71.272 125.73,73.101 126.733,73.101 126.733,72.86 128.232,72.86 128.511,73.139 128.511,78.613 126.289,80.835 120.955,80.835 120.955,82.791 121.945,82.791 121.945,82.525 123.774,82.525 124.015,82.766 124.015,88.684 122.288,90.411 116.294,90.411 116.294,92.469 117.284,92.469 117.284,92.202 118.681,92.202 119.24,92.761 119.24,102.413 118.935,102.718 117.234,102.718 117.234,104.712 118.262,104.712 118.262,104.47 119.875,104.47 120.078,104.673 120.078,110.426 117.958,112.547 117.958,116.218 118.999,116.218 118.999,115.887 120.84,115.887 120.955,116.002 120.955,126.771 119.837,126.771 119.837,126.517 118.745,126.517 118.745,128.079 119.786,129.121 122.06,129.121 124.015,127.165 124.015,93.04 127.508,89.548 127.508,84.722 132.41,79.819 132.41,74.016 137.008,69.418 137.008,64.884 141.148,60.744 141.148,55.423 145.847,50.724 145.847,46.152 150.101,41.897 153.949,41.897 161.379,34.468 161.379,28.702 158.559,25.883 155.651,25.883 155.181,26.352
5V on Top Layer "NONET_L-01_P-001" (solid, pour order 14): 106.693,101.994 107.886,101.994 107.886,101.727 109.423,101.727 109.703,102.006 109.703,107.582 107.544,109.741 107.544,113.347 108.661,113.347 108.661,113.017 110.236,113.017 110.566,113.347 110.566,118.377 108.09,120.853 108.09,123.99 109.068,123.99 109.068,123.812 113.195,123.812 113.487,123.52 113.487,122.834 113.131,122.478 113.131,102.222 109.436,98.527 107.201,98.527 106.693,99.035
5V on Top Layer "NONET_L-01_P-001" (solid, pour order 4): 94.653,134.429 95.682,134.429 95.682,137.566 94.602,137.566 88.811,137.566 87.617,136.373 87.617,103.048 82.41,97.841 82.41,84.01 77.546,79.146 77.546,72.06 75.857,70.371 74.143,70.371 71.209,67.437 71.209,59.322 69.545,57.658 67.983,56.096 67.983,48.984 56.794,37.795 56.794,26.505 60.427,22.873 62.243,22.873 63.132,23.762 63.132,28.816 63.322,28.816 63.322,29.997 61.151,29.997 60.604,30.543 60.604,34.506 67.983,41.885 67.983,44.882 70.218,44.882 70.218,44.59 71.209,44.59 71.209,55.715 73.381,55.715 73.381,55.499 74.346,55.499 74.346,65.951 75.463,67.069 77.546,67.069 77.546,66.84 78.727,66.84 78.727,68.745 80.645,70.663 80.645,78.092 82.779,78.092 82.779,77.838 83.757,77.838 83.757,81.267 85.56,83.071 85.56,88.976 87.617,88.976 87.617,88.722 88.621,88.722 88.621,99.644 89.548,100.571 92.037,100.571 92.037,100.305 93.078,100.305 93.078,104.064 91.262,105.88 91.262,111.773 93.129,111.773 93.129,111.62 94.132,111.62
5V on Top Layer "NONET_L-01_P-001" (solid, pour order 3): 84.874,16.383 84.874,18.212 87.681,18.212 87.681,24.575 85.369,26.886 80.162,26.886 80.162,29.781 82.639,29.781 84.544,31.686 84.544,40.703 87.224,40.703 87.694,41.173 87.694,46.876 89.027,48.209 89.7,48.209 90.005,48.514 90.005,50.127 92.481,50.127 95.186,52.832 95.186,60.223 97.866,60.223 100.254,62.611 100.254,69.837 102.895,69.837 103.353,70.294 103.276,70.371 103.276,75.311 104.457,76.492 109.055,76.492 109.055,74.841 105.55,74.841 105.55,68.212 107.34,66.421 114.694,66.421 114.694,57.861 116.04,56.515 120.548,56.515 120.548,55.296 117.704,55.296 117.272,54.864 117.272,49.657 119.863,47.066 126.187,47.066 126.187,45.783 123.33,45.783 123.088,45.542 123.088,40.221 125.578,37.732 131.864,37.732 131.864,36.043 129.502,36.043 128.689,35.23 128.689,30.582 130.874,28.397 137.719,28.397 137.719,26.391 128.461,26.391 125.578,29.274 125.578,33.693 120.332,38.938 120.332,42.532 114.262,48.603 114.262,52.502 108.153,58.61 108.153,61.722 106.909,62.967 104.635,62.967 100.114,58.445 98.26,56.591 98.26,51.232 91.491,44.463 91.491,16.383
5V on Top Layer "NONET_L-01_P-001" (solid, pour order 19): 55.245,87.795 55.245,87.058 56.121,86.182 58.331,86.182 59.182,87.033 59.182,87.795
5V on Top Layer "NONET_L-01_P-001" (solid, pour order 15): 98.476,175.292 98.476,180.899 105.334,187.757 110.998,187.757 116.446,182.308 116.446,179.464 122.022,173.888 122.022,171.666 121.666,171.31 118.034,171.31 118.034,172.593 118.377,172.593 118.377,174.104 117.907,174.574 117.805,174.473 111.671,174.473 111.239,174.041 111.239,172.441 111.188,172.39 109.245,172.39 109.245,173.596 109.576,173.596 109.576,174.079 108.941,174.714 101.065,174.714
5V on Top Layer "NONET_L-01_P-001" (solid, pour order 13): 103.264,86.474 101.841,87.897 101.841,89.256 100.94,90.157 100.94,96.05 102.794,96.05 102.794,95.758 103.797,95.758 103.797,97.815 99.822,97.815 99.06,97.053 99.06,85.928 100.216,84.772 102.273,84.772 102.273,84.658 103.264,84.658
5V on Top Layer "NONET_L-01_P-001" (solid, pour order 12): 128.562,132.436 130.226,132.436 130.226,136.931 129.997,137.16 124.054,137.16 123.126,136.233 119.405,136.233 119.405,138.189 119.672,138.189 119.672,139.255 117.589,139.255 117.589,135.28 118.885,133.985 126.022,133.985 127.368,135.331 128.537,135.331 128.981,134.887 128.981,133.515 128.562,133.515
5V on Top Layer "NONET_L-01_P-001" (solid, pour order 11): 128.46,121.412 128.46,120.256 128.181,120.256 128.181,118.593 130.708,118.593 134.353,114.948 136.081,114.948 136.081,112.37 136.334,112.116 141.77,112.116 143.002,110.884 145.034,110.884 145.034,107.658 145.313,107.379 149.276,107.379 150.266,106.388 151.587,106.388 151.879,106.68 153.391,106.68 153.391,105.562 153.213,105.562 153.213,103.505 150.584,103.505 148.552,105.537 142.824,105.537 138.582,109.779 134.15,109.779 131.826,112.103 127.584,116.345 126.111,117.818 126.111,121.412
5V on Bottom Layer "NONET_L-01_P-001" (solid, pour order 6): 127.597,117.043 128.486,117.932 128.486,127.762 126.39,129.857 123.355,129.857 123.355,137.909 125.12,139.675 125.12,152.921 122.06,155.981 122.06,172.882 121.689,173.253 119.659,173.253 118.872,172.466 118.872,169.621 114.783,165.532 114.783,161.163 114.63,161.163 113.957,160.49 113.017,160.49 112.179,161.328 108.052,161.328 107.569,160.845 107.569,159.715 108.229,159.055 109.576,159.055 111.519,157.112 111.519,152.082 115.24,148.361 119.901,148.361 120.764,147.498 120.764,145.186 117.958,142.38 117.958,126.581 121.018,123.52 123.939,123.52 126.098,121.361 126.098,117.805 126.86,117.043 127.584,117.043
GND on Bottom Layer "NONET_L02_P020" (solid, remove dead copper, shelved, pour order 20): 13.398,94.176 13.4,94.844 cw(c107.431,94.169) 13.486,98.236 cw(c108.373,94.129) 13.641,100.929 cw(c109.341,94.06) 13.836,103.248 cw(c110.279,93.97) 14.06,105.342 ccw(c16.538,106.451) 16.216,103.755 ccw(c16.534,106.46) 16.397,103.74 ccw(c16.535,106.49) 16.536,103.737 ccw(c16.536,106.495) 16.674,103.74 ccw(c16.535,106.451) 19.229,106.118 ccw(c16.523,106.448) 19.245,106.307 ccw(c16.496,106.45) 19.249,106.45 ccw(c16.495,106.45) 19.245,106.588 ccw(c16.535,106.45) 16.868,109.143 ccw(c16.537,106.437) 16.678,109.16 ccw(c16.536,106.41) 16.536,109.163 16.49,109.163 ccw(c16.535,106.421) 16.339,109.156 ccw(c16.53,106.469) 15.285,108.858 ccw(c16.546,106.44) 14.434,108.165 cw(c106.909,94.405) 20.624,130.405 ccw(c23.311,130.799) 21.771,128.563 ccw(c23.301,130.779) 22.634,128.17 ccw(c23.301,130.782) 22.991,128.104 ccw(c23.304,130.81) 23.168,128.089 ccw(c23.306,130.84) 23.306,128.086 ccw(c23.306,130.844) 23.444,128.089 ccw(c23.305,130.8) 25.999,130.467 ccw(c23.292,130.797) 26.016,130.656 ccw(c23.266,130.799) 26.019,130.799 ccw(c23.261,130.799) 26.016,130.938 ccw(c23.305,130.799) 23.638,133.492 ccw(c23.308,130.788) 23.449,133.509 ccw(c23.306,130.76) 23.306,133.512 ccw(c23.306,130.763) 23.244,133.512 ccw(c23.305,130.786) 23.08,133.503 ccw(c23.302,130.82) 22.506,133.392 ccw(c23.304,130.813) 22.07,133.214 ccw(c23.318,130.787) 21.764,133.03 cw(c107.829,93.914) 53.412,171.22 ccw(c58.467,172.294) 57.847,167.164 ccw(c58.46,172.319) 58.197,167.134 ccw(c58.463,172.373) 58.464,167.128 ccw(c58.464,172.377) 58.727,167.134 ccw(c58.463,172.293) 63.589,171.66 ccw(c58.433,172.289) 63.621,172.02 ccw(c58.385,172.291) 63.628,172.292 ccw(c58.406,172.292) 63.626,172.411 ccw(c58.428,172.293) 63.611,172.703 ccw(c58.516,172.302) 63.183,174.387 ccw(c58.483,172.287) 62.789,175.107 ccw(c58.427,172.249) 61.61,176.38 cw(c107.372,94.762) 96.031,187.644 cw(c107.512,93.722) 102.74,188.223 cw(c107.563,92.753) 107.567,188.345 108.189,188.343 cw(c107.575,92.784) 113.131,188.183 cw(c107.59,94.201) 188.756,141.902 ccw(c189.022,136.683) 188.633,141.894 ccw(c189.018,136.745) 184.783,139.699 ccw(c188.984,136.761) 184.021,138.047 ccw(c188.99,136.761) 183.892,137.355 ccw(c189.046,136.754) 183.864,137.015 ccw(c189.099,136.752) 183.857,136.751 ccw(c189.106,136.751) 183.864,136.488 ccw(c189.022,136.752) 188.389,131.625 ccw(c189.018,136.784) 188.749,131.594 ccw(c189.021,136.834) 189.021,131.587 ccw(c189.021,136.829) 189.141,131.589 ccw(c189.023,136.787) 189.432,131.603 ccw(c189.032,136.699) 191.109,132.029 ccw(c189.017,136.732) 191.833,132.423 ccw(c188.978,136.788) 193.105,133.599 cw(c108.158,94.371) 200.997,106.02 cw(c107.157,94.232) 201.61,99.086 cw(c106.186,94.18) 201.736,94.176 201.731,93.211 cw(c108.008,94.184) 201.676,90.809 cw(c107.085,94.216) 201.578,88.74 cw(c106.161,94.269) 201.453,86.883 cw(c105.177,94.345) 201.306,85.182 201.141,83.594 ccw(c198.446,83.272) 199.957,85.527 ccw(c198.453,83.287) 199.254,85.863 ccw(c198.455,83.29) 198.773,85.966 ccw(c198.45,83.259) 198.59,85.981 ccw(c198.449,83.232) 198.449,85.985 ccw(c198.448,83.231) 198.31,85.982 ccw(c198.449,83.271) 195.755,83.604 ccw(c198.465,83.273) 195.739,83.415 ccw(c198.492,83.272) 195.735,83.272 ccw(c198.493,83.272) 195.739,83.133 ccw(c198.449,83.272) 198.117,80.578 ccw(c198.447,83.287) 198.306,80.562 ccw(c198.449,83.315) 198.449,80.558 198.477,80.558 ccw(c198.449,83.306) 198.617,80.563 ccw(c198.446,83.271) 200.999,82.353 cw(c108.192,93.955) 195.022,59.193 cw(c107.343,94.396) 161.685,17.106 ccw(c156.483,16.811) 161.678,17.203 ccw(c156.53,16.814) 159.48,21.051 ccw(c156.545,16.848) 157.827,21.812 ccw(c156.546,16.842) 157.138,21.94 ccw(c156.539,16.789) 156.798,21.968 ccw(c156.536,16.734) 156.536,21.975 ccw(c156.535,16.73) 156.272,21.968 ccw(c156.536,16.809) 151.41,17.442 ccw(c156.566,16.814) 151.379,17.083 ccw(c156.618,16.811) 151.372,16.811 ccw(c156.64,16.81) 151.372,16.746 ccw(c156.604,16.81) 151.383,16.461 ccw(c156.536,16.81) 154.067,12.274 cw(c107.771,93.583) 119.009,0.695 cw(c107.623,94.677) 112.408,0.129 cw(c107.572,95.649) 107.567,0.006 106.733,0.01 cw(c107.557,95.524) 101.662,0.189 cw(c107.546,94.158) 26.083,46.95 ccw(c25.955,52.184) 26.308,46.96 ccw(c25.959,52.11) 30.218,49.194 ccw(c25.988,52.098) 30.929,50.713 ccw(c25.987,52.097) 31.083,51.493 ccw(c25.931,52.104) 31.113,51.839 ccw(c25.879,52.107) 31.12,52.107 ccw(c25.874,52.107) 31.113,52.371 ccw(c25.954,52.106) 26.587,57.233 ccw(c25.959,52.076) 26.228,57.264 ccw(c25.956,52.028) 25.955,57.271 ccw(c25.955,52.03) 25.849,57.27 ccw(c25.954,52.073) 25.563,57.256 ccw(c25.945,52.161) 23.826,56.81 ccw(c25.962,52.126) 23.125,56.423 ccw(c26.001,52.069) 21.823,55.194 cw(c106.958,93.966) 14.094,82.676 cw(c108.07,94.12) 13.521,89.325 cw(c109.045,94.171)
5V on Bottom Layer "NONET_L-01_P-001" (solid, pour order 8): 68.885,28.169 60.871,28.169 60.871,25.413 61.646,24.638 79.35,24.638 82.258,27.546 82.258,29.82 73.254,29.82 71.603,28.169
5V on Bottom Layer "NONET_L-01_P-001" (solid, pour order 18): 67.894,99.479 88.049,99.479 89.446,100.876 89.446,101.409 87.401,103.454 69.596,103.454
5V on Bottom Layer "NONET_L-01_P-001" (solid, pour order 9): 132.931,26.886 132.931,28.08 133.528,28.677 156.629,28.677 157.074,28.232 157.074,26.53 156.413,25.87 135.141,25.87 133.947,25.87
5V on Bottom Layer "NONET_L-01_P-001" (solid, pour order 7): 100.419,95.009 101.651,96.241 103.238,97.828 108.179,97.828 108.814,98.463 108.814,100.813 108.204,101.422 100.99,101.422 98.692,99.123 98.692,95.263 98.946,95.009
5V on Bottom Layer "NONET_L-01_P-001" (solid, pour order 5): 94.615,136.081 94.615,137.071 95.034,137.49 100,137.49 100.419,137.071 103.188,137.071 107.34,141.224 107.772,141.656 108.648,141.656 108.953,141.351 108.953,139.281 108.039,138.367 108.039,135.115 109.779,135.115 113.474,131.42 113.474,122.796 112.535,121.856 111.481,121.856 110.96,122.377 110.96,128.079 108.356,130.683 102.273,130.683 97.79,135.166 94.983,135.166 94.615,135.534

## Keep-outs
Keep-Out Layer:
  lines w2: 13.398,94.176 ccw(c109.044,94.171) 13.521,89.325 ccw(c108.071,94.12) 14.094,82.676 ccw(c106.958,93.966) 21.823,55.194 cw(c26.001,52.069) 23.125,56.423 cw(c25.962,52.126) 23.826,56.81 cw(c25.945,52.161) 25.563,57.256 cw(c25.954,52.07) 25.849,57.27 cw(c25.955,52.03) 25.955,57.271 cw(c25.956,52.023) 26.228,57.264 cw(c25.959,52.077) 26.587,57.233 cw(c25.954,52.106) 31.113,52.371 cw(c25.87,52.107) 31.12,52.107 cw(c25.874,52.107) 31.113,51.839 cw(c25.929,52.104) 31.083,51.493 cw(c25.987,52.097) 30.929,50.713 cw(c25.988,52.098) 30.218,49.194 cw(c25.959,52.11) 26.308,46.96 cw(c25.955,52.188) 26.083,46.95 ccw(c107.546,94.158) 101.662,0.189 ccw(c107.557,95.524) 106.733,0.01 107.567,0.006 ccw(c107.571,95.651) 112.408,0.129 ccw(c107.623,94.677) 119.009,0.695 ccw(c107.771,93.583) 154.067,12.274 cw(c156.536,16.81) 151.383,16.461 cw(c156.605,16.81) 151.372,16.746 cw(c156.641,16.811) 151.372,16.811 cw(c156.62,16.811) 151.379,17.083 cw(c156.566,16.814) 151.41,17.442 cw(c156.536,16.809) 156.272,21.968 cw(c156.536,16.726) 156.536,21.975 cw(c156.536,16.731) 156.798,21.968 cw(c156.539,16.785) 157.138,21.94 cw(c156.546,16.842) 157.827,21.812 cw(c156.545,16.848) 159.48,21.051 cw(c156.53,16.814) 161.678,17.203 cw(c156.467,16.81) 161.685,17.106 ccw(c107.343,94.396) 195.022,59.193 ccw(c108.192,93.955) 200.999,82.353 cw(c198.446,83.271) 198.617,80.563 cw(c198.449,83.305) 198.477,80.558 198.449,80.558 cw(c198.449,83.316) 198.306,80.562 cw(c198.447,83.287) 198.117,80.578 cw(c198.449,83.272) 195.739,83.133 cw(c198.493,83.272) 195.735,83.272 cw(c198.493,83.272) 195.739,83.415 cw(c198.465,83.273) 195.755,83.604 cw(c198.449,83.271) 198.31,85.982 cw(c198.449,83.227) 198.449,85.985 cw(c198.449,83.229) 198.59,85.981 cw(c198.45,83.258) 198.773,85.966 cw(c198.455,83.29) 199.254,85.863 cw(c198.453,83.287) 199.957,85.527 cw(c198.446,83.272) 201.141,83.594 201.306,85.182 ccw(c105.158,94.346) 201.453,86.883 ccw(c106.116,94.272) 201.578,88.74 ccw(c107.066,94.217) 201.676,90.809 ccw(c108.008,94.184) 201.731,93.211 201.736,94.176 ccw(c106.18,94.18) 201.61,99.086 ccw(c107.156,94.232) 200.997,106.02 ccw(c108.158,94.371) 193.105,133.599 cw(c188.979,136.788) 191.833,132.423 cw(c189.017,136.732) 191.109,132.029 cw(c189.032,136.699) 189.432,131.603 cw(c189.023,136.787) 189.141,131.589 cw(c189.021,136.829) 189.021,131.587 cw(c189.021,136.836) 188.749,131.594 cw(c189.018,136.781) 188.389,131.625 cw(c189.023,136.752) 183.864,136.488 cw(c189.106,136.751) 183.857,136.751 cw(c189.101,136.752) 183.864,137.015 cw(c189.046,136.754) 183.892,137.355 cw(c188.99,136.761) 184.021,138.047 cw(c188.984,136.761) 184.783,139.699 cw(c189.018,136.745) 188.633,141.894 cw(c189.022,136.68) 188.756,141.902 ccw(c107.59,94.201) 113.131,188.183 ccw(c107.575,92.782) 108.189,188.343 107.567,188.345 ccw(c107.563,92.748) 102.74,188.223 ccw(c107.512,93.721) 96.031,187.644 ccw(c107.372,94.762) 61.61,176.38 cw(c58.427,172.249) 62.789,175.107 cw(c58.483,172.287) 63.183,174.387 cw(c58.516,172.302) 63.611,172.703 cw(c58.428,172.293) 63.626,172.411 cw(c58.386,172.292) 63.628,172.292 cw(c58.379,172.292) 63.621,172.02 cw(c58.433,172.289) 63.589,171.66 cw(c58.463,172.293) 58.727,167.134 cw(c58.464,172.377) 58.464,167.128 cw(c58.463,172.375) 58.197,167.134 cw(c58.46,172.321) 57.847,167.164 cw(c58.467,172.294) 53.412,171.22 ccw(c107.829,93.914) 21.764,133.03 cw(c23.318,130.787) 22.07,133.214 cw(c23.304,130.813) 22.506,133.392 cw(c23.302,130.82) 23.08,133.503 cw(c23.305,130.784) 23.244,133.512 cw(c23.306,130.763) 23.306,133.512 cw(c23.306,130.755) 23.449,133.509 cw(c23.308,130.783) 23.638,133.492 cw(c23.305,130.799) 26.016,130.938 cw(c23.261,130.799) 26.019,130.799 cw(c23.262,130.799) 26.016,130.656 cw(c23.29,130.797) 25.999,130.467 cw(c23.306,130.8) 23.444,128.089 cw(c23.306,130.844) 23.306,128.086 cw(c23.306,130.84) 23.168,128.089 cw(c23.304,130.812) 22.991,128.104 cw(c23.301,130.782) 22.634,128.17 cw(c23.301,130.779) 21.771,128.563 cw(c23.311,130.799) 20.624,130.405 ccw(c106.909,94.405) 14.434,108.165 cw(c16.546,106.44) 15.285,108.858 cw(c16.53,106.468) 16.339,109.156 cw(c16.535,106.418) 16.49,109.163 16.536,109.163 cw(c16.536,106.406) 16.678,109.16 cw(c16.537,106.434) 16.868,109.143 cw(c16.535,106.45) 19.245,106.588 cw(c16.491,106.45) 19.249,106.45 cw(c16.491,106.45) 19.245,106.307 cw(c16.52,106.448) 19.229,106.118 cw(c16.535,106.451) 16.674,103.74 cw(c16.536,106.495) 16.536,103.737 cw(c16.535,106.49) 16.397,103.74 cw(c16.534,106.461) 16.216,103.755 cw(c16.538,106.451) 14.06,105.342 ccw(c110.298,93.968) 13.836,103.248 ccw(c109.336,94.061) 13.641,100.929 ccw(c108.383,94.129) 13.486,98.236 ccw(c107.432,94.169) 13.4,94.844 13.398,94.176 ; 104.396,180.653 cw(c107.474,180.653) 104.4,180.813 cw(c107.442,180.655) 104.418,181.024 cw(c107.425,180.653) 107.27,183.678 cw(c107.424,180.603) 107.425,183.682 cw(c107.425,180.604) 107.584,183.678 cw(c107.426,180.636) 107.795,183.66 cw(c107.424,180.653) 110.449,180.808 cw(c107.375,180.653) 110.453,180.653 cw(c107.375,180.653) 110.449,180.494 cw(c107.407,180.651) 110.431,180.283 cw(c107.424,180.654) 107.579,177.629 cw(c107.425,180.703) 107.425,177.625 cw(c107.424,180.703) 107.265,177.629 cw(c107.423,180.671) 107.054,177.647 cw(c107.425,180.654) 104.4,180.499 cw(c107.474,180.653) 104.396,180.653 ; 104.479,8.408 cw(c107.557,8.408) 104.483,8.567 cw(c107.525,8.41) 104.501,8.778 cw(c107.508,8.407) 107.353,11.432 cw(c107.507,8.358) 107.507,11.436 cw(c107.507,8.358) 107.667,11.432 cw(c107.509,8.39) 107.878,11.414 cw(c107.506,8.407) 110.532,8.562 cw(c107.457,8.408) 110.536,8.408 cw(c107.458,8.408) 110.532,8.248 cw(c107.49,8.406) 110.513,8.037 cw(c107.507,8.408) 107.662,5.383 cw(c107.507,8.458) 107.507,5.379 cw(c107.507,8.457) 107.348,5.383 cw(c107.505,8.425) 107.137,5.402 cw(c107.508,8.408) 104.482,8.253 cw(c107.557,8.408) 104.479,8.408 ; 189.126,58.877 cw(c191.884,58.878) 189.13,59.02 cw(c191.856,58.879) 189.147,59.209 cw(c191.84,58.877) 191.701,61.587 cw(c191.84,58.833) 191.84,61.591 cw(c191.84,58.833) 191.983,61.587 cw(c191.841,58.862) 192.172,61.571 cw(c191.839,58.877) 194.55,59.016 cw(c191.795,58.878) 194.553,58.877 cw(c191.796,58.877) 194.549,58.734 cw(c191.824,58.876) 194.533,58.545 cw(c191.839,58.878) 191.978,56.168 cw(c191.84,58.922) 191.84,56.164 cw(c191.84,58.922) 191.697,56.168 cw(c191.838,58.893) 191.508,56.184 cw(c191.84,58.878) 189.13,58.739 cw(c191.884,58.877) 189.126,58.877

## Other copper
Top Layer:
  region net 5V: 71.869,109.073 71.869,110.782 70.053,112.598 70.053,119.228 70.46,119.634 73.025,119.634 73.127,119.532 73.127,128.74 73.812,129.426 76.708,129.426 76.708,135.598 73.711,135.598 67.526,129.413 67.526,109.106
  region net 5V: 55.245,87.795 55.245,95.733 61.811,102.298 70.612,102.298 70.612,99.593 64.16,99.593 59.182,94.615 59.182,87.795
  region net 5V: 76.708,130.531 76.708,133.286 81.026,137.605 83.807,137.605 83.807,141.021 87.808,145.021 91.072,145.021 91.072,147.053 93.65,149.631 102.019,149.631 102.184,149.466 102.184,151.536 89.649,151.536 73.05,134.938 73.05,131.636
  region net 5V: 102.184,150.717 102.184,151.816 100.101,153.899 100.101,158.699 103.48,158.699 103.48,159.995 97.752,159.995 97.193,160.553 97.193,166.548 97.536,166.891 100.343,166.891 100.343,172.669 103.035,175.362 103.035,176.38 98.476,176.38 94.183,172.088 94.183,156.07 89.25,151.137
  text "Power input" at 35.522,87.846 h3
  text "5V" at 48.082,85.471 h3
  text "SPI / Connector" at 37.948,70.434 h3
  text "Designed by Knalle @ ETF" at 96.812,22.238 h3
Bottom Layer:
  region net 5V: 70.549,99.479 70.549,106.972 70.549,111.316 67.488,111.316 67.488,99.479

## Silkscreen, mask and mechanical layers (free items; w line width, h text height)
Top Overlay:
  drawing of 243 lines, arcs and shapes, not listed